# Altium PCB PCB1.PcbDoc
Units mil, origin at the board's own origin, x right, y up, seen from the top; angles counter-clockwise.
Board outline 1192.03 x 600.03 mil, 2 copper layers (Top Layer, Bottom Layer); 18 components, 12 nets, 58 pads, 20 vias.
Unrouted connection lines stored in the file: 17.
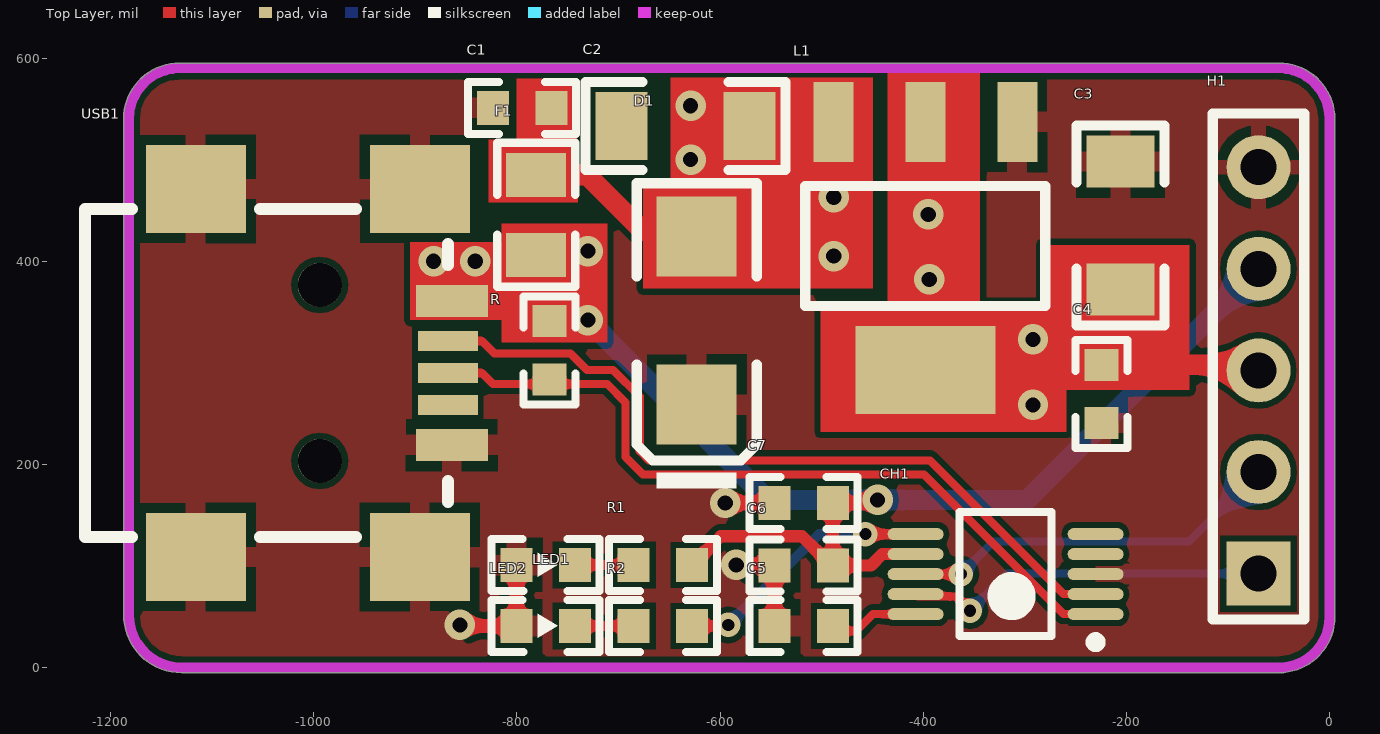
[diagram p0: Top Layer view]
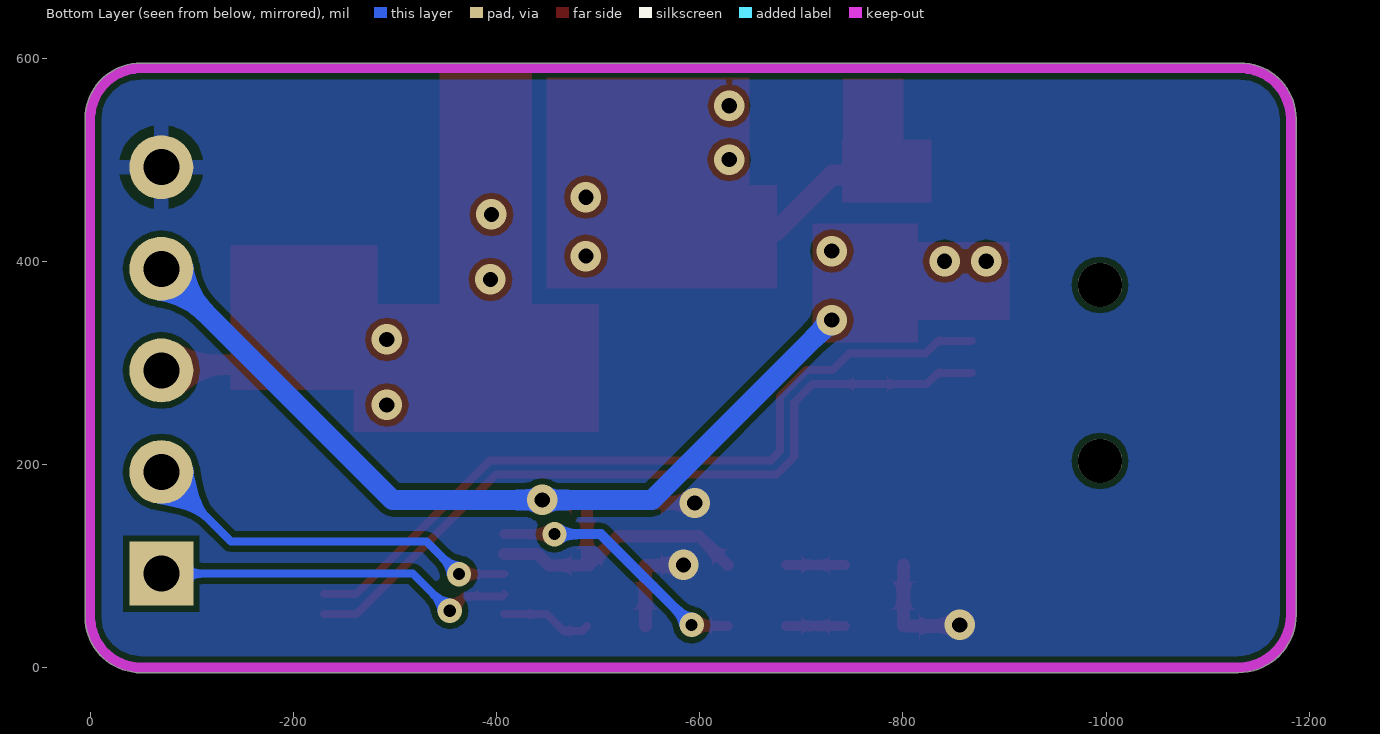
[diagram p1: Bottom Layer view, seen from below]
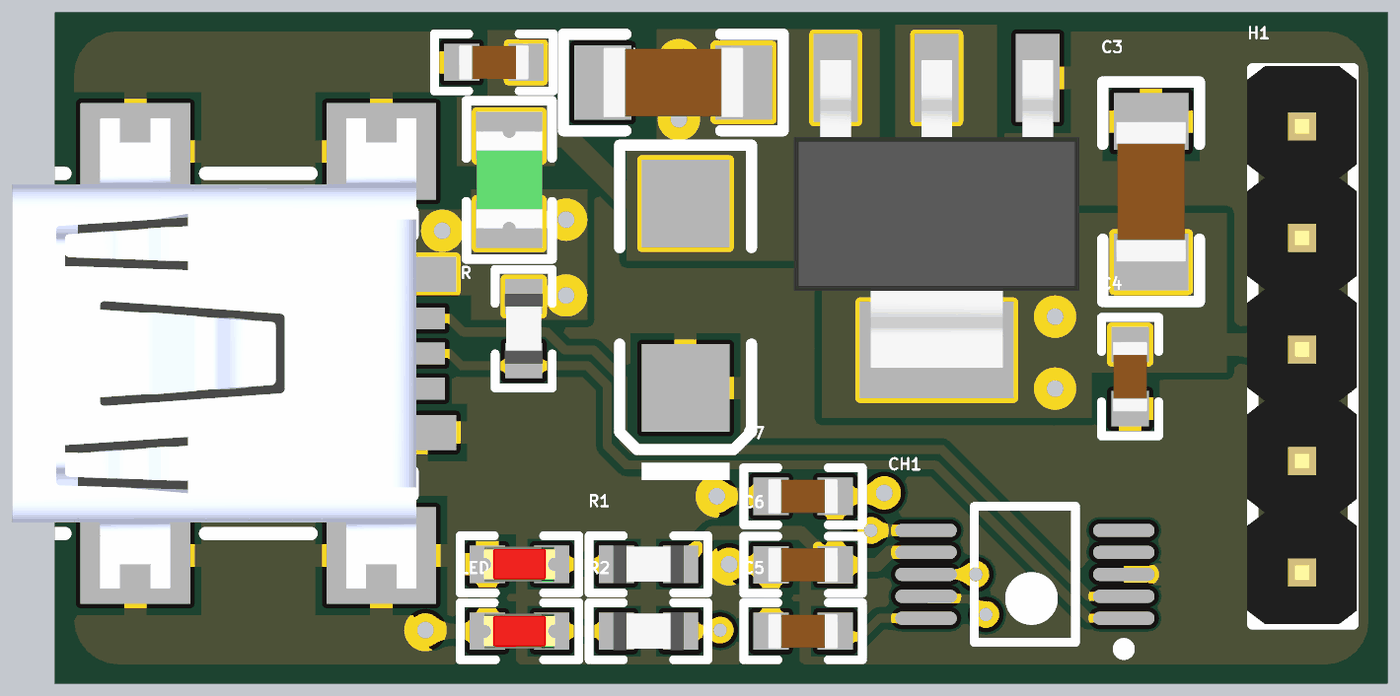
[diagram p2: 3D render of the assembled board from above, using the file's embedded part models]

## Layer stack, top to bottom
Top Solder: solder mask 0.4, Solder Resist, Dk 3.5
Top Layer: signal copper 1.4
Dielectric 1: dielectric 12.6, FR-4, Dk 4.8
Bottom Layer: signal copper 1.4
Bottom Solder: solder mask 0.4, Solder Resist, Dk 3.5

## Board outline
-1187.02,52 -1187.02,540 cw(c-1132,540) -1132,595.02 cw(c-1132,590) -1131.97,595.02 -50,595.02 cw(c-50,540) 5.02,540 5.02,50 ccw(c0,50) 5.02,50.03 5.02,50 cw(c-50,50) -50,-5.01 -1130,-5.01 cw(c-1130,0) -1130.03,-5.01 ccw(c-1130,52) -1130,-5.01 -1130.03,-5.01 cw(c-1130,52)

## Design rules (kind name [scope] priority, off if disabled: settings)
Clearance [InNetClass('All Nets')] p1: gap=6 ignorepadtopadclearanceinfootprint=TRUE
DiffPairsRouting DiffPair_USBDiffPairsRouting [InDifferentialPairClass('90 om')] p1: maxlimit=8 minlimit=6 mostfreqgap=6 toplayer_minwidth=6 toplayer_maxwidth=8 toplayer_prefwidth=6 bottomlayer_minwidth=6 bottomlayer_maxwidth=8 bottomlayer_prefwidth=6 maxuncoupledlength=500
DiffPairsRouting [All] p2: maxlimit=10 minlimit=10 mostfreqgap=10 toplayer_minwidth=15 toplayer_maxwidth=15 toplayer_prefwidth=15 bottomlayer_minwidth=15 bottomlayer_maxwidth=15 bottomlayer_prefwidth=15 maxuncoupledlength=500
MatchedLengths DiffPair_USBMatchedLengths [InDifferentialPairClass('90 om')] p1: tolerance=1000 checknetsindiffpair=FALSE checkdiffpairvsdiffpair=TRUE checkxsignals=TRUE checkothers=TRUE
PlaneClearance [All] p1: clearance=8
PlaneConnect [All] p1: planeconnectstyle=Relief reliefexpansion=10 reliefentries=4 reliefconductorwidth=6 reliefairgap=8
PolygonConnect [All] p1: thpad.connectstyle=Relief thpad.reliefconductorwidth=15 thpad.reliefentries=4 thpad.polygonreliefangle="90 Angle" thpad.airgapwidth=10 smdpad.connectstyle=Relief smdpad.reliefconductorwidth=20 smdpad.reliefentries=4 smdpad.polygonreliefangle="90 Angle" smdpad.airgapwidth=10 via.connectstyle=Direct via.reliefconductorwidth=10 via.reliefentries=4 via.polygonreliefangle="90 Angle" via.airgapwidth=10
RoutingVias PIN_Vias [InNetClass('PIN')] p1: holewidth=12 width=24 viastyle="Through Hole" minholewidth=12 minwidth=24 maxholewidth=12 maxwidth=24
RoutingVias POWER_Vias [All] p2: holewidth=15 width=30 viastyle="Through Hole" minholewidth=15 minwidth=30 maxholewidth=30 maxwidth=60
SolderMaskExpansion [All] p1: expansion=4
UnRoutedNet [All] p1: checkbadconnections=TRUE
Width PIN [InNetClass('PIN')] p1: maxlimit=10 minlimit=6 preferedwidth=10
Width POWER [InNetClass('POWER')] p2: maxlimit=80 minlimit=12 preferedwidth=12
26 further rules are at their usual default settings.

## Classes and differential pairs
differential pair class "90 om": D_USB_
net class POWER: 3V3 5V GND NetC1_2
net class PIN: NetC5_1 NetLED1_1 NetLED2_1 RXD TNOW TXD
component class Sheet1: C1 C2 C3 C4 C5 C6 C7 CH1 D1 F1 H1 LED1 LED2 R R1 R2
differential pair D_USB_: +USB_+ -USB_-

## Components (designator, comment, footprint, x,y, rotation, side; value= is the part's Value field where it differs from the comment)
C1 "104" C_SOP_0603 -794.74,551 r0 top
C2 "106" C_SOP_1206 -633.99,533 r0 top
C3 "106" C_SOP_1206 -206,434.99 r90 top
C4 "104" C_SOP_0603 -224.78,269.26 r270 top
C5 "104" C_SOP_0603 -517.74,41 r180 top
C6 "104" C_SOP_0603 -517.74,100.5 r180 top
C7 "106" C_SOP_0603 -517.74,162 r180 top
CH1 "CH340E" MSOP_10 -319,92 r180 top
D1 "DIODE" LC-SMA(DO-214AC)_S5 -623,341.68 r90 top
F1 "6V/1A" Fuse_0805 -781,445.63 r90 top
H1 "XH2.54(5PIN)" "Header 2.54X5" -70,292.5 r90 top
L1 "LDO-3.3-AMS1117" SOT223_3 -398,415 r90 top
LED1 "LED" LED_0603_R -771.74,101 r180 top
LED2 "LED" LED_0603_R -771.74,41 r180 top
R "10K" R_SMD_0603 -768,312.26 r270 top
R1 "4.7K" R_SMD_0603 -656.26,101 r180 top
R2 "4.7K" R_SMD_0603 -656.26,41 r180 top
USB1 "USB_AB" USB_MINI_SMD -990,290 r180 top

## Footprints (in the part's own frame and the unit in brackets; to place one, negate y for a bottom-side part, rotate by r counter-clockwise, add the part's x,y. Pads: shape width x height; smd on the part's side, far side on the other; paste and mask are expansions set on the pad)
C_SOP_0603 [mm]
  rect 0.8x0.85 smd: 1(-0.73,0) 2(0.73,0)
  silkscreen extent -1.35,-0.65 1.35,0.65, body extent -0.8,-0.4 0.8,0.4, height 0.6
C_SOP_1206 [mm]
  rect 1.3x1.7 smd: 1(-1.6,0) 2(1.6,0)
  silkscreen extent -2.5,-1.1 2.5,1.1, body extent -1.6,-0.8 1.6,0.8, height 0.95
Fuse_0805 [mm]
  rect 1.1x1.5 smd: 1(-1,0) 2(1,0)
  silkscreen extent -1.8,-0.98 1.8,0.98, body extent -1.1,-0.75 1.1,0.75, height 1.24
"Header 2.54X5" [mm]
  rect 1.6x1.6 hole 0.9: 1(-5.08,0)
  round 1.6 hole 0.9: 2(-2.54,0) 3(0,0) 4(2.54,0) 5(5.08,0)
  silkscreen extent -6.22,-1.14 6.42,1.14, body extent -6.22,-1.23 6.48,1.27, height 8.3
LC-SMA(DO-214AC)_S5 [mm]
  rect 2x2 smd: 1(2.1,0) 2(-2.1,0)
  silkscreen extent -4.2,-1.5 3.43,1.5
LED_0603_R [mm]
  rect 0.8x0.85 smd: 1(-0.73,0) 2(0.73,0)
  silkscreen extent -1.35,-0.65 1.35,0.65, body extent -0.81,-0.4 0.81,0.4, height 0.6
MSOP_10 [mm] "TSSOP, 10-Leads, Body 3.00x3.00mm, Pitch 0.50mm, IPC Medium Density"
  oval 1.4x0.3 smd: 1(-2.25,1) 2(-2.25,0.5) 3(-2.25,0) 4(-2.25,-0.5) 5(-2.25,-1) 6(2.25,-1) 7(2.25,-0.5) 8(2.25,0) 9(2.25,0.5) 10(2.25,1)
  silkscreen extent -2.38,-1.55 1.15,1.82, body extent -1.55,-1.55 1.55,1.55, height 1.1
R_SMD_0603 [mm]
  rect 0.8x0.85 smd: 1(-0.73,0) 2(0.73,0)
  silkscreen extent -1.35,-0.65 1.35,0.65, body extent -0.8,-0.43 0.8,0.43, height 0.48
SOT223_3 [mm]
  rect 2x1 smd: 1(3.1,-2.3) 2(3.1,0) 3(3.1,2.3)
  rect 2.2x3.5 smd: 4(-3.1,0)
  silkscreen extent -1.5,-3 1.5,3, body extent -3.5,-3.25 3.5,3.25, height 1.64
USB_MINI_SMD [mm]
  rect 1.8x0.8 smd: 1(-3.2,-1.8) 5(-3.2,1.8)
  rect 1.5x0.5 smd: 2(-3.1,-0.8) 3(-3.1,0) 4(-3.1,0.8)
  round 1.1 hole 1.1 unplated: H1(0.1,2.2) H2(0.1,-2.2)
  rect 2.5x2.2 smd: H3(-2.4,-4.6) H4(-2.4,4.6) H5(3.2,-4.6) H6(3.2,4.6)
  silkscreen extent -3.1,-4.1 5.97,4.1, body extent -3.2,-5.35 6,5.35, height 3.95

## Part data
C1 C2 C3 C4 C5 C6 C7: library part C_SMD
F1: library part FUSE
R R1 R2: library part R_SMD

## Via types
v1: diameter 30, hole 15, Top Layer to Bottom Layer, 16 vias
v2: diameter 24, hole 12, Top Layer to Bottom Layer, 4 vias

## Nets (pads, with @x,y where several pads share a name; then routed paths per layer and width w, separated by ;. In a path a pad name is that pad's centre, name@x,y a point inside that pad or via, vN(x,y) a via of type N, cw(c..) or ccw(c..) an arc to the next point about the centre after c; other vN are vias at no path point)
3V3: C3.1 C4.1 H1.3 L1.2 L1.4 | length 157.1
  Top Layer w20: C4.1 -75.5,298 H1.3
  other v1: -292,258.5 -292,323 -394,382 -395,446
5V: C6.1 C7.1 CH1.7 F1.1 H1.4 R1.1 R.1 USB1.1 | length 1182.5
  Top Layer w12: R1.1 -599.29,129.23 -519.23,129.23 -490.5,100.5 C6.1 ; v1(-445,165) -448,162 C7.1 C6.1 ; CH1.7 -440.31,111.68 -451.5,100.5 C6.1
  Bottom Layer w20: v1(-730,342) -553,165 v1(-445,165) -297.5,165 H1.4
  other v1: -882,400 -841,400 -730,410
GND: C1.1 C2.1 C3.2 C4.2 C5.2 C6.2 C7.2 CH1.3 D1.2 H1.5 L1.1 LED1.2 LED2.2 USB1.5 USB1.H3 USB1.H4 USB1.H5 USB1.H6 | length 261.7
  Top Layer w13: v1(-856,42) -855,41 LED2.2 LED1.2 ; v1(-595,162) C7.2 ; v1(-584,101) -583.5,100.5 C6.2 C5.2
NetC1_2: C1.2 C2.2 D1.1 F1.2 L1.3 | length 183.1
  Top Layer w20: F1.2 -731,485 -676,430 -628.65,430 D1.1
  other v1: -488,405 -488,463 -629,500 -629,553
NetC5_1: C5.1 CH1.10 | length 90.4
  Top Layer w8: C5.1 -484,36 -466,36 -449.37,52.63 CH1.10
NetLED1_1: LED1.1 R1.2 | length 58
  Top Layer w10: LED1.1 R1.2
NetLED2_1: LED2.1 R2.2 | length 58
  Top Layer w10: LED2.1 R2.2
RXD: CH1.9 H1.1 | length 359.5
  Top Layer w8: CH1.9 -405.27,70 -368,70 v2(-354,56)
  Bottom Layer w8: v2(-354,56) -317.5,92.5 H1.1
TNOW: CH1.6 R2.1 | length 257.4
  Top Layer w10: R2.1 -593,41 v2(-592,42) ; v2(-457,131.37) CH1.6
  Bottom Layer w10: v2(-592,42) -502.63,131.37 v2(-457,131.37)
TXD: CH1.8 H1.2 | length 379.2
  Top Layer w8: CH1.8 v2(-363,92)
  Bottom Layer w8: v2(-363,92) -331,124 -138.5,124 H1.2
USB_+: CH1.1 R.2 USB1.3 | length 767.4
  Top Layer w8: USB1.3 -834.43,290 -823.43,279 -711,279 -693,261 -693,207.2 -675.8,190 -399.35,190 -261.98,52.63 CH1.1
USB_-: CH1.2 USB1.2 | length 772.3
  Top Layer w8: USB1.2 -834.43,321.5 -822.2,309.27 -747.13,309.27 -730.86,293 -705.2,293 -679,266.8 -679,213 -670,204 -393.55,204 -261.86,72.31 CH1.2
pads on no net: CH1.4 CH1.5 USB1.4 USB1.H1 USB1.H2

## Polygon pours and split planes (outlines as drawn)
GND on Bottom Layer (solid, remove dead copper, pour order 20): -1187.02,52 -1187.02,540 cw(c-1132,540) -1132,595.02 cw(c-1132,590) -1131.97,595.02 -50,595.02 cw(c-50,540) 5.02,540 5.02,50 ccw(c0,50) 5.02,50.03 5.02,50 cw(c-50,50) -50,-5.01 -1130,-5.01 cw(c-1130,0) -1130.03,-5.01 ccw(c-1130,52) -1130,-5.01 -1130.03,-5.01 cw(c-1130,52)
GND on Top Layer (solid, remove dead copper, pour order 22): -1187.02,52 -1187.02,540 cw(c-1132,540) -1132,595.02 cw(c-1132,590) -1131.97,595.02 -50,595.02 cw(c-50,540) 5.02,540 5.02,50 ccw(c0,50) 5.02,50.03 5.02,50 cw(c-50,50) -50,-5.01 -1130,-5.01 cw(c-1130,0) -1130.03,-5.01 ccw(c-1130,52) -1130,-5.01 -1130.03,-5.01 cw(c-1130,52)

## Keep-outs
Keep-Out Layer:
  lines w10: -1125,590 -1132,590 ; -1132,590 ccw(c-1132,540) -1182,540 -1182,52 ccw(c-1130,52) -1130,0 -50,0 ccw(c-50,50) 0,50 0,540 ccw(c-50,540) -50,590 -1132,590

## Other copper
Top Layer:
  rectangle net NetC1_2: -676,373 -553,475
  rectangle net 3V3: -501,232 -259,358
  rectangle net 3V3: -283,273 -138,416
  rectangle net 3V3: -435,245 -344,585
  rectangle net NetC1_2: -800.48,472 -741,580
  rectangle net NetC1_2: -828,458 -740,520
  rectangle net NetC1_2: -649,373 -449.37,581
  rectangle net 5V: -815,320 -711,437
  rectangle net 5V: -905,342 -730,419